# Altium PCB MW7_PA.PcbDoc
Units mm, origin at the board's own origin, x right, y up, seen from the top; angles counter-clockwise.
Board outline 102.95 x 61.65 mm, 2 copper layers (Top Layer, Bottom Layer); 33 components, 16 nets, 118 pads, 666 vias.
Unrouted connection lines stored in the file: 24.
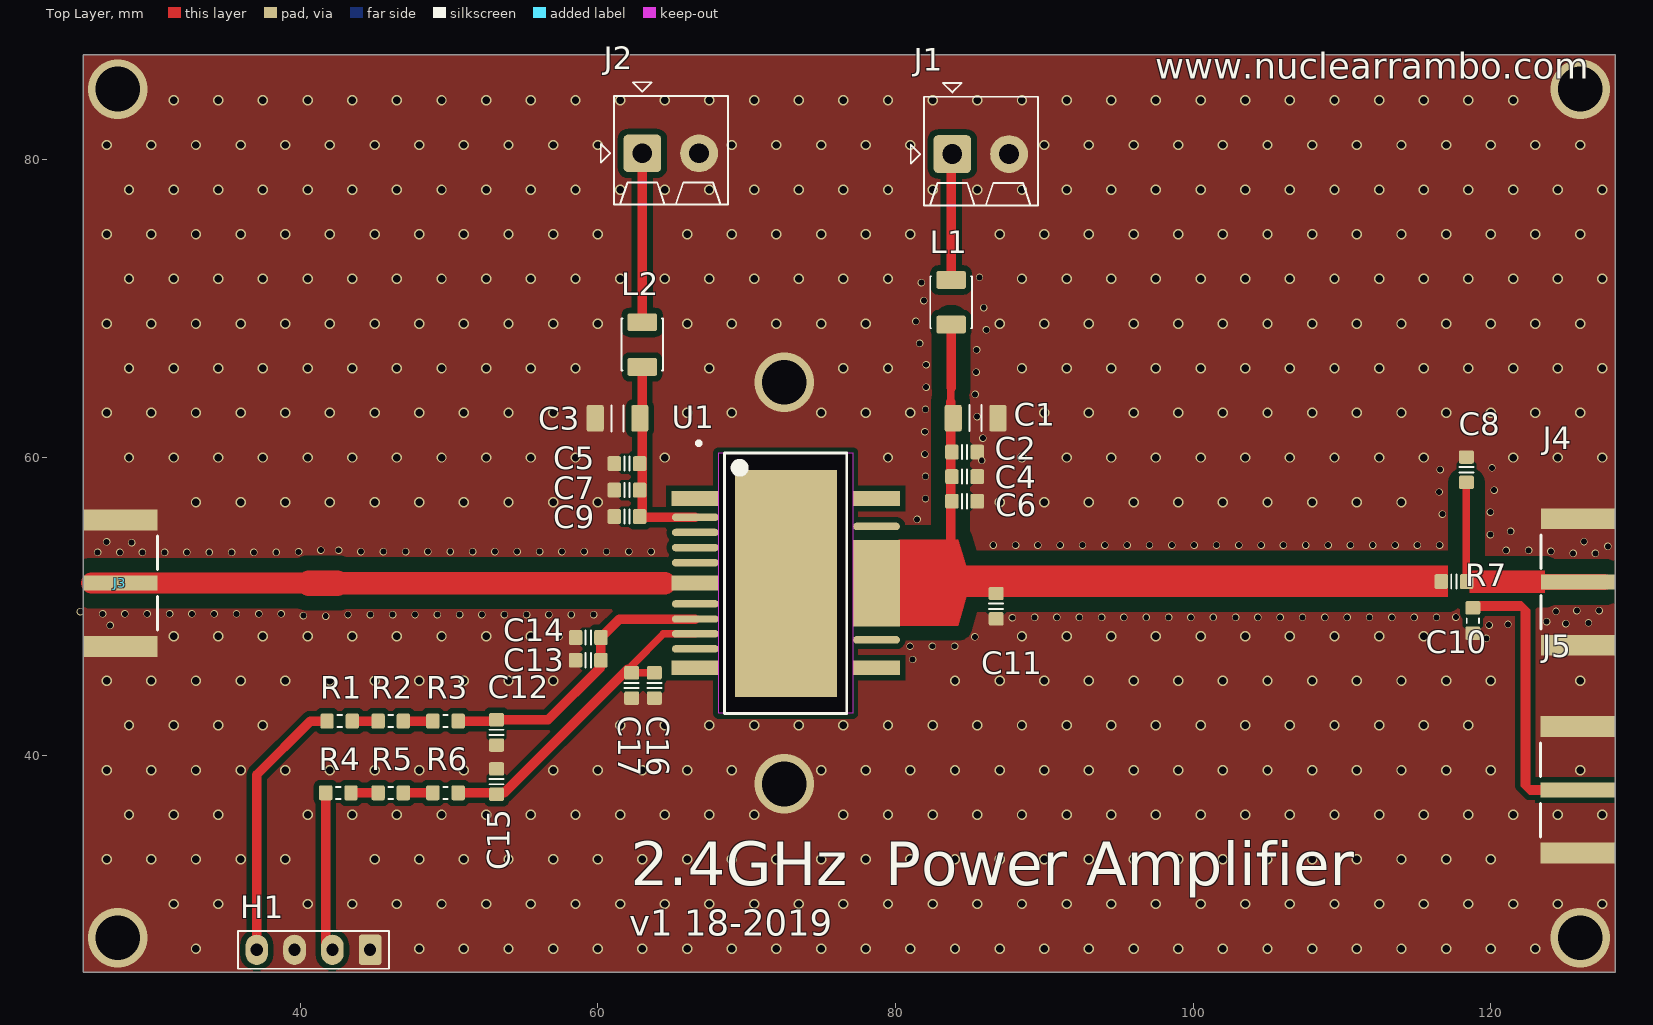
[diagram p0: Top Layer view]
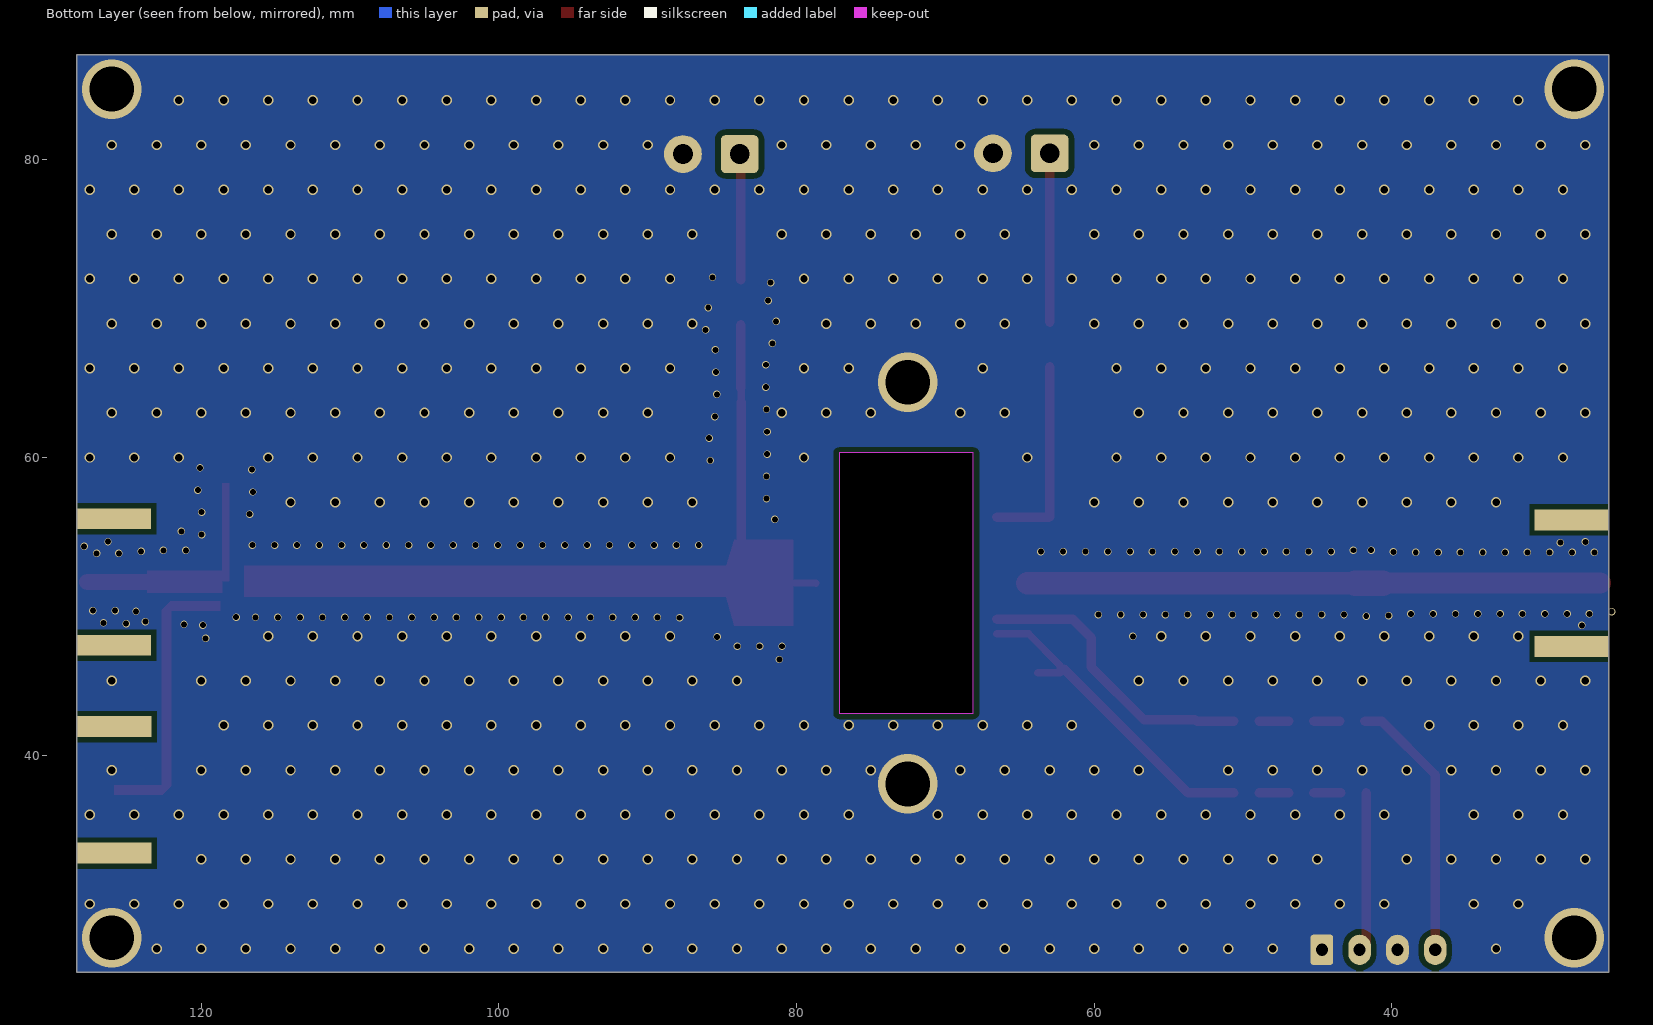
[diagram p1: Bottom Layer view, seen from below]

## Layer stack, top to bottom
Top Solder: solder mask 0.0102, Solder Resist, Dk 3.5
Top Layer: signal copper 0.0356
Dielectric 1: dielectric 0.32, FR-4, Dk 4.8
Bottom Layer: signal copper 0.0356
Bottom Solder: solder mask 0.0102, Solder Resist, Dk 3.5

## Board outline
25.425,25.425 25.425,87.071 128.372,87.071 128.372,25.425
cut-out: 77.128,60.312 77.128,42.812 68.128,42.812 68.128,60.312

## Design rules (kind name [scope] priority, off if disabled: settings)
Clearance [(InNet('RF_out') or InNet('RF_match_out') or InNet('RFin')) and not IsPad vs InNet('GND')] p1: gap=1 ignorepadtopadclearanceinfootprint=TRUE
Clearance Clearance_1 [All] p2: gap=0.381 ignorepadtopadclearanceinfootprint=TRUE
PolygonConnect [All] p1: connectstyle=Direct reliefconductorwidth=0.254 reliefentries=4 polygonreliefangle="90 Angle" airgapwidth=0.254
RoutingVias [All] p1: holewidth=0.711 width=1.27 viastyle="Through Hole" minholewidth=0.711 minwidth=1.27 maxholewidth=0.711 maxwidth=1.27
SolderMaskExpansion [All] p1: expansion=0.102
Width [All] p1: maxlimit=6 minlimit=0.254 preferedwidth=1.4
30 further rules are at their usual default settings.

## Components (designator, comment, footprint, x,y, rotation, side; value= is the part's Value field where it differs from the comment)
C1 "10u" CAPC3216X180N 85.38,62.643 r180 top value=100n
C2 "approved sub OK" CAPC1608X90N 84.642,60.365 r0 top value=1µ
C3 "100n" CAPC3216X180N 61.325,62.636 r0 top
C4 "6.8p" CAPC1608X90N 84.642,58.714 r0 top
C5 "approved sub OK" CAPC1608X90N 61.96,59.588 r180 top value=1µ
C6 "approved sub OK" CAPC1608X90N 84.642,57.063 r0 top value=10n
C7 "approved sub OK" CAPC1608X90N 61.96,57.81 r180 top value=10n
C8 "6.8p" CAPC1608X90N 118.364,59.182 r270 top
C9 "6.8p" CAPC1608X90N 61.96,56.032 r180 top
C10 "3.6p" CAPC1608X90N 117.526,51.664 r180 top
C11 "2.4p" CAPC1608X90N 86.766,50.013 r270 top
C12 "approved sub OK" CAPC1608X90N 53.197,41.529 r270 top value=1µ
C13 "approved sub OK" CAPC1608X90N 59.36,46.38 r180 top value=10n
C14 "6.8p" CAPC1608X90N 59.36,47.904 r180 top
C15 "approved sub OK" CAPC1608X90N 53.197,38.227 r90 top value=1µ
C16 "approved sub OK" CAPC1608X90N 63.8,44.685 r270 top value=10n
C17 "6.8p" CAPC1608X90N 62.276,44.685 r270 top
H1 "Programmer" HDR1X4_2.54MMP 44.704,26.924 r180 top
J1 "Stackable ScrewTerm" 2P_PCB_ScrewTerm_90S_3.81MM 83.82,80.391 r270 top value="2 position"
J2 "Stackable ScrewTerm" 2P_PCB_ScrewTerm_90S_3.81MM 62.992,80.442 r270 top value="2 position"
J3 "RFIN" ROS-32K145-400L5_V 25.4,51.562 r90 top
J4 "RFOUT" ROS-32K145-400L5_V 128.372,51.638 r270 top
J5 "RFmon" ROS-32K145-400L5_V 128.346,37.668 r270 top
L1 "NLCV32T" INDM3225X240N 83.741,70.434 r90 top value=2µ2
L2 "NLCV32T" INDM3225X240N 62.988,67.589 r90 top value=2µ2
R1 "Thick Film" RESC1608X55N 42.656,42.291 r0 top value=15K
R2 "Thick Film" RESC1608X55N 46.085,42.291 r0 top value=1K
R3 "Thick Film" RESC1608X55N 49.768,42.291 r0 top value=1K
R4 "Thick Film" RESC1608X55N 42.568,37.469 r0 top value=15K
R5 "Thick Film" RESC1608X55N 46.085,37.469 r0 top value=1K
R6 "Thick Film" RESC1608X55N 49.768,37.469 r0 top value=1K
R7 "Thick Film" RESC1608X55N 118.796,49.047 r270 top value=51R
U1 "MW7IC2725N1" CFP102P1410X258-16N 72.628,51.562 r0 top

## Footprints (in the part's own frame and the unit in brackets; to place one, negate y for a bottom-side part, rotate by r counter-clockwise, add the part's x,y. Pads: shape width x height; smd on the part's side, far side on the other; paste and mask are expansions set on the pad)
2P_PCB_ScrewTerm_90S_3.81MM [mil] "TERM BLOCK 2POS SIDE ENT STACKABLE 3.81MM"
  rrect25% 100x100 hole 52: 1(0,0)
  round 100 hole 52: 2(0,150)
  silkscreen extent -188,-110 136,226, body extent -152,-75 136,225, height 335
CAPC1608X90N [mm] "Chip Capacitor, Body 1.6x0.8mm, EIA 0603, IPC Medium Density"
  round 0.254 on Mech15: 0(0,0)
  rrect25% 0.9x1 smd: 1(-0.85,0) 2(0.85,0)
  Top Layer pour cut-out: -0.6,0.5 -0.4,0.7 0.4,0.7 0.6,0.5 0.6,-0.5 0.4,-0.7 -0.4,-0.7 -0.6,-0.5
  silkscreen extent -0.18,-0.48 0.18,0.48, body extent -0.85,-0.45 0.85,0.45, height 0.89
CAPC3216X180N [mm] "Chip Capacitor, Body 3.2x1.6mm, 1.8mm H, EIA 1206, IPC Medium Density"
  round 0.508 on Mech15: 0(0,0)
  rrect25% 1.15x1.8 smd: 1(-1.5,0) 2(1.5,0)
  silkscreen extent -0.4,-0.88 0.4,0.88, body extent -1.7,-0.9 1.7,0.9, height 1.8
CFP102P1410X258-16N [mm] "CFP, 16-Leads, Body 17.50x9.00mm (max), Pitch 1.02mm, IPC Medium Density"
  rect 3.15x1 smd: 1(-6.096,5.69) 6(-6.096,0) 11(-6.096,-5.69) 12(6.096,-5.69) 16(6.096,5.69)
  oval 3.15x0.5 smd: 2(-6.071,4.42) 3(-6.071,3.404) 4(-6.071,2.388) 5(-6.071,1.372) 7(-6.071,-1.397) 8(-6.071,-2.413) 9(-6.071,-3.404) 10(-6.071,-4.42) 13(6.096,-3.81) 15(6.096,3.81)
  rect 3.15x5.8 smd: 14(6.096,0)
  rect 6.86x15.24 smd: 17(0.025,-0.025)
  silkscreen extent -5.97,-8.75 4.1,9.52, body extent -4.5,-8.75 4.5,8.75, height 2.58
HDR1X4_2.54MMP [mil] "Connector; Header; 4 Position 0.100\" pitch"
  rrect25% 60x80 hole 32: 1(0,0)
  oval 60x80 hole 32: 2(100,0) 3(200,0) 4(300,0)
  silkscreen extent -50,-50 350,50
INDM3225X240N [mm] "Molded Inductor, 2-Leads, Body 3.2x2.5mm, IPC Medium Density"
  round 0.508 on Mech15: 0(0,0)
  rrect25% 1.2x2 smd: 1(-1.5,0) 2(1.5,0)
  silkscreen extent -1.75,-1.4 1.75,1.4, body extent -1.79,-1.35 1.79,1.35, height 2.4
RESC1608X55N [mm] "Chip Resistor, Body 1.6x0.8mm, EIA 0603, IPC Medium Density"
  round 0.254 on Mech15: 0(0,0)
  rrect25% 0.9x1 smd: 1(-0.85,0) 2(0.85,0)
  Top Layer pour cut-out: -0.6,0.5 -0.4,0.7 0.4,0.7 0.6,0.5 0.6,-0.5 0.4,-0.7 -0.4,-0.7 -0.6,-0.5
  silkscreen extent -0.15,-0.41 0.15,0.41, body extent -0.87,-0.47 0.88,0.48, height 0.54
ROS-32K145-400L5_V [mm] "SMA Right Angle Jack, Edge Mount, 14.25x9.5x4.46mm, Rosenberger Recommended"
  rect 1x5 smd: 1(0,-2.5)
  rect 1.4x5 smd: MP(-4.25,-2.5) MP(4.25,-2.5)
  rect 1.4x5 smd far side paste-2: ""(-4.25,-2.5) ""(4.25,-2.5)
  silkscreen extent -3.15,-5 3.15,-5, body extent -4.75,-4.75 4.75,9.5, height 4.46

## Part data
C1 C3: library part CAPC_100n_1206_NP0_50V_5%, "Capacitor SMD Cer 100nF 1206 NP0 50V 5%", Manufacturer 1="TDK Corporation", Manufacturer Part Number 1=C3216C0G1H104J160AA, Operating Temperature="-55°C ~ 125°C", Package / Case="1206 (3216 Metric)", Ratings="50V; NP0", Supplier Part Number 1=445-7694-1-ND, Tolerance=±5%, ComponentLink1Description=http://product.tdk.com/capacitor/mlcc/en/documents/mlcc_commercial_general_en.pdf, ComponentLink1URL=http://product.tdk.com/capacitor/mlcc/en/documents/mlcc_commercial_general_en.pdf, SCDType=undef, Size / Dimension="0.126\" L x 0.063\" W (3.20mm x 1.60mm)", Supplier 1=Digi-Key, Thickness (Max)="0.075\" (1.90mm)"
C2 C5 C12 C15: library part CAPC_1u_0603_X7R_16V_10%, "Capacitor SMD Cer 1uF 10% 16V X7R 0603", Manufacturer 1="TDK Corporation", Manufacturer Part Number 1=C1608X7R1C105K, Package / Case="0603 (1608 metric)", Ratings="16V; X7R", Supplier Part Number 1=445-1604-1-ND, Tolerance=±10%, ComponentLink1Description=http://product.tdk.com/capacitor/mlcc/en/documents/mlcc_commercial_general_en.pdf, ComponentLink1URL=http://product.tdk.com/capacitor/mlcc/en/documents/mlcc_commercial_general_en.pdf, Material=ceramic, SCDType=spec, Supplier 1=Digi-Key
C4 C8 C9 C10 C11 C14 C17: library part CAPC_8p_0603_NP0_50V, "Capacitor SMD Cer 8pF ±0.5pF 50V NP0 0603", Manufacturer 1="Murata Electronics North America", Manufacturer Part Number 1=GRM1885C1H8R0DZ01D, Operating Temperature="-55°C ~ 125°C", Package / Case="0603 (1608 Metric)", Ratings="50V; NP0", Supplier Part Number 1=490-1399-1-ND, Tolerance=±0.5pF, ComponentLink1Description="GRM1885C1H8R0DZ01 datasheet.pdf", ComponentLink1URL=http://search.murata.co.jp/Ceramy/image/img/PDF/ENG/GRM1885C1H8R0DZ01.pdf, SCDType=undef, Size / Dimension="0.063\" L x 0.032\" W (1.60mm x 0.81mm)", Supplier 1=Digi-Key, Thickness (Max)="0.035\" (0.90mm)"
C6 C7 C13 C16: library part CAPC_10n_0603_X7R_100V_10%, "Capacitor SMD Cer 10nF 10% 100V X7R 0603", Manufacturer="Murata Electronics North America", Manufacturer Part Number=GCM188R72A103KA37D, Package / Case="0603 (1608 metric)", Ratings="100V; X7R", Supplier Part Number 1=490-4781-1-ND, Tolerance=±10%, Material=ceramic, SCDType=undef, Supplier 1=Digi-Key
H1: library part Header4P, "Header 4-pin"
J1 J2: library part 2P_ScrewTerm_90S_3.81MM, "Terminal Block Screw Type THT 2-Position 3.81mm pitch", Color=Black, Manufacturer 1="Tyco Electronics", Manufacturer Part Number 1=1776113-2, Package / Case="Side Entry; 3.81mm pitch", Supplier Part Number 1=A97976-ND, Category="Connectors Interconnects", Pitch="0.150\" (3.81mm)", Positions Per Level=2, SCDType=undef, Supplier 1=Digi-Key
J3 J4 J5: library part 32K145-400L5, "SMA Right Angle Jack, Edge Mount, Up to 18 GHz, -55 to 155 degC", ComponentLink1Description="Manufacturer URL", ComponentLink1URL=http://www.rosenberger.de, ComponentLink2Description=Datasheet, ComponentLink2URL=http://rosenberger.de/ok/images/documents/db/32K145-400L5.pdf, ComponentLink3Description="Package Specification", ComponentLink3URL=http://rosenberger.de/ok/images/documents/db/32K145-400L5.pdf, ComponentLink4Description="Series Overview / Design Note", ComponentLink4URL=http://rosenberger.de/ok/images/documents/spez/32.pdf, ComponentLink5Description="Webshop / RFQ", ComponentLink5URL=http://www.rosenberger.com/en/contact/sales/, DatasheetVersion=b00, Desgin Note 2="For more information about DRC setting, please look at following webpage, http://techdocs.altium.com/display/SCRT/Design+Rule+for+Edge-Mount+Connectors", Design Note 1="Footprint in library is a generic example - only application specific footprint delivers High Performance", Mounting Technology="Surface Mount", PackageDescription="SMA Right Angle Jack, Edge Mount, 14.25 x 9.5 x 4.46 mm", PackageReference=32K145-400L5, PackageVersion=b00, PartNumber=32K145-400L5
L1 L2: library part INDC_2u2_1210_1200mA, "Inductor 2.2uH 1.2A 1210 SMD chip", DC Resistance (DCR)="115 mOhm", Frequency - Self Resonant=68MHz, Frequency - Test=7.96MHz, Manufacturer 1="TDK Corporation", Manufacturer Part Number 1=NLCV32T-2R2M-PFR, Operating Temperature="-40°C ~ 125°C", Package / Case="1210 (3225 Metric)", Q @ Freq="15 @ 7.96MHz", Ratings="1.2 Adc", Supplier Part Number 1=445-3650-1-ND, Tolerance=±20%, ComponentLink1Description=http://www.tdk.co.jp/tefe02/e511_nlcv_nlc.pdf, ComponentLink1URL=http://www.tdk.co.jp/tefe02/e511_nlcv_nlc.pdf, SCDType=source, Supplier 1=Digi-Key, Type="Ferrite Core"
R1 R4: library part RES_15K_0603_1%, "Resistor SMD chip 15k Ohm 0.1W 1% 0603", Manufacturer 1="Rohm Semiconductor", Manufacturer 2=Yageo, Manufacturer 3="Panasonic Electronic Components", Manufacturer 4="Stackpole Electronics Inc", Manufacturer 5="Vishay Dale", Manufacturer Part Number 1=MCR03ERTF1502, Manufacturer Part Number 2=RC0603FR-0715KL, Manufacturer Part Number 3=ERJ-3EKF1502V, Manufacturer Part Number 4=RMCF0603FT15K0, Manufacturer Part Number 5=CRCW060315K0FKEAHP, Package / Case="0603 (1608 metric)", Ratings="1/10 W", Supplier Part Number 1=RHM15.0KCFCT-ND, Tolerance=±1%, ComponentLink1Description=http://rohmfs.rohm.com/en/products/databook/datasheet/passive/resistor/chip_resistor/mcr_g.pdf, ComponentLink1URL=http://rohmfs.rohm.com/en/products/databook/datasheet/passive/resistor/chip_resistor/mcr_g.pdf, ComponentLink2Description=http://www.yageo.com/documents/recent/PYu-RC0603_51_RoHS_L_4.pdf, ComponentLink2URL=http://www.yageo.com/documents/recent/PYu-RC0603_51_RoHS_L_4.pdf, ComponentLink3Description=http://industrial.panasonic.com/www-cgi/jvcr13pz.cgi?E+PZ+3+AOA0002+ERJ3EKF1502V+7+WW, ComponentLink3URL=http://industrial.panasonic.com/www-cgi/jvcr13pz.cgi?E+PZ+3+AOA0002+ERJ3EKF1502V+7+WW, ComponentLink4Description=http://www.seielect.com/Catalog/SEI-RMCF_RMCP.pdf, ComponentLink4URL=http://www.seielect.com/Catalog/SEI-RMCF_RMCP.pdf, ComponentLink5Description=http://www.vishay.com/docs/20043/crcwhpe3.pdf, ComponentLink5URL=http://www.vishay.com/docs/20043/crcwhpe3.pdf, Material="Thick Film", RoHS 1="RoHS Compliant", RoHS 2="RoHS Compliant", RoHS 3="RoHS Compliant", RoHS 4="RoHS Compliant", RoHS 5="RoHS Compliant", SCDType=spec, Supplier 1=Digi-Key, Supplier 2=Digi-Key, Supplier 3=Digi-Key, Supplier 4=Digi-Key, Supplier 5=Digi-Key, Supplier Part Number 2=311-15.0KHRCT-ND, Supplier Part Number 3=P15.0KHCT-ND, Supplier Part Number 4=RMCF0603FT15K0CT-ND, Supplier Part Number 5=541-15.0KSCT-ND
R2 R3 R5 R6: library part RES_1K_0603_1%, "Resistor SMD chip 1k Ohm 0.1W 1% 0603", Manufacturer 1=Yageo, Manufacturer Part Number 1=RC0603FR-071KL, Package / Case="0603 (1608 Metric)", Ratings=1/10W, Supplier Part Number 1=311-1.00KHRCT-ND, Tolerance=±1%, SCDType=spec, Supplier 1=Digi-Key
R7: library part RES_51R_0603_1%, "Resistor SMD chip 51 Ohm 0.1W 1% 0603", Manufacturer 1=Yageo, Manufacturer Part Number 1=RC0603FR-0751RL, Package / Case="0603 (1608 metric)", Ratings="1/10 W", Supplier Part Number 1=311-51.0HRCT-ND, Tolerance=±1%, Material="Thick Film", SCDType=spec, Supplier 1=Digi-Key
U1: "The MW7IC2725N wideband integrated circuit is designed with on- chip / matching that makes it usable from 2300- 2700 MHz. This multi- stage / structure is rated for 26 to 32 Volt operation and covers all typical cellular / base station modulation formats.", ComponentLink1Description=Datasheet, ComponentLink1URL=https://www.nxp.com/docs/en/data-sheet/MW7IC2725N.pdf

## Via types
v1: diameter 0.7, hole 0.5, Top Layer to Bottom Layer, 514 vias
v2: diameter 0.5, hole 0.4, Top Layer to Bottom Layer, 146 vias
v3: diameter 4, hole 3, Top Layer to Bottom Layer, 6 vias

## Nets (pads, with @x,y where several pads share a name; then routed paths per layer and width w, separated by ;. In a path a pad name is that pad's centre, name@x,y a point inside that pad or via, vN(x,y) a via of type N, cw(c..) or ccw(c..) an arc to the next point about the centre after c; other vN are vias at no path point)
GND: C1.1 C2.2 C3.1 C4.2 C5.2 C6.2 C7.2 C8.1 C9.2 C11.2 C12.2 C13.2 C14.2 C15.2 C16.2 C17.2 H1.1 H1.3 J1.2 J2.2 J3.MP J4.MP J5.MP R7.2 U1.17
  other v1: 33,27 48,27 51,27 54,27 57,27 60,27 63,27 66,27 69,27 72,27 75,27 78,27 81,27 84,27 87,27 90,27 93,27 96,27 99,27 102,27 105,27 108,27 111,27 114,27 117,27 120,27 123,27 31.5,30 34.5,30 40.5,30 43.5,30 46.5,30 49.5,30 52.5,30 55.5,30 58.5,30 61.5,30 64.5,30 67.5,30 70.5,30 73.5,30 76.5,30 79.5,30 82.5,30 85.5,30 88.5,30 91.5,30 94.5,30 97.5,30 100.5,30 103.5,30 106.5,30 109.5,30 112.5,30 115.5,30 118.5,30 121.5,30 124.5,30 127.5,30 27,33 30,33 33,33 36,33 39,33 45,33 48,33 51,33 54,33 57,33 60,33 63,33 66,33 69,33 72,33 75,33 78,33 81,33 84,33 87,33 90,33 93,33 96,33 99,33 102,33 105,33 108,33 111,33 114,33 117,33 120,33 28.5,36 31.5,36 34.5,36 40.5,36 43.5,36 46.5,36 49.5,36 52.5,36 55.5,36 58.5,36 61.5,36 64.5,36 67.5,36 70.5,36 76.5,36 79.5,36 82.5,36 85.5,36 88.5,36 91.5,36 94.5,36 97.5,36 100.5,36 103.5,36 106.5,36 109.5,36 112.5,36 115.5,36 118.5,36 121.5,36 124.5,36 127.5,36 27,39 30,39 33,39 36,39 39,39 42,39 45,39 48,39 51,39 57,39 60,39 63,39 66,39 69,39 75,39 78,39 81,39 84,39 87,39 90,39 93,39 96,39 99,39 102,39 105,39 108,39 111,39 114,39 117,39 120,39 126,39 28.5,42 31.5,42 34.5,42 37.5,42 61.5,42 64.5,42 67.5,42 70.5,42 73.5,42 76.5,42 79.5,42 82.5,42 85.5,42 88.5,42 91.5,42 94.5,42 97.5,42 100.5,42 103.5,42 106.5,42 109.5,42 112.5,42 115.5,42 118.5,42 27,45 30,45 33,45 36,45 39,45 42,45 45,45 48,45 51,45 54,45 57,45 84,45 87,45 90,45 93,45 96,45 99,45 102,45 105,45 108,45 111,45 114,45 117,45 120,45 126,45 31.5,48 34.5,48 37.5,48 40.5,48 43.5,48 46.5,48 49.5,48 52.5,48 55.5,48 88.5,48 91.5,48 94.5,48 97.5,48 100.5,48 103.5,48 106.5,48 109.5,48 112.5,48 115.5,48 33,57 36,57 39,57 42,57 45,57 48,57 51,57 54,57 57,57 60,57 87,57 90,57 93,57 96,57 99,57 102,57 105,57 108,57 111,57 114,57 28.5,60 31.5,60 34.5,60 37.5,60 40.5,60 43.5,60 46.5,60 49.5,60 52.5,60 55.5,60 58.5,60 64.5,60 79.5,60 88.5,60 91.5,60 94.5,60 97.5,60 100.5,60 103.5,60 106.5,60 109.5,60 112.5,60 115.5,60 121.5,60 124.5,60 127.5,60 27,63 30,63 33,63 36,63 39,63 42,63 45,63 48,63 51,63 54,63 57,63 66,63 69,63 75,63 78,63 81,63 90,63 93,63 96,63 99,63 102,63 105,63 108,63 111,63 114,63 117,63 120,63 123,63 126,63 28.5,66 31.5,66 34.5,66 37.5,66 40.5,66 43.5,66 46.5,66 49.5,66 52.5,66 55.5,66 58.5,66 67.5,66 76.5,66 79.5,66 88.5,66 91.5,66 94.5,66 97.5,66 100.5,66 103.5,66 106.5,66 109.5,66 112.5,66 115.5,66 118.5,66 121.5,66 124.5,66 127.5,66 27,69 30,69 33,69 36,69 39,69 42,69 45,69 48,69 51,69 54,69 57,69 60,69 66,69 69,69 72,69 75,69 78,69 87,69 90,69 93,69 96,69 99,69 102,69 105,69 108,69 111,69 114,69 117,69 120,69 123,69 126,69 28.5,72 31.5,72 34.5,72 37.5,72 40.5,72 43.5,72 46.5,72 49.5,72 52.5,72 55.5,72 58.5,72 61.5,72 64.5,72 67.5,72 70.5,72 73.5,72 76.5,72 79.5,72 88.5,72 91.5,72 94.5,72 97.5,72 100.5,72 103.5,72 106.5,72 109.5,72 112.5,72 115.5,72 118.5,72 121.5,72 124.5,72 127.5,72 27,75 30,75 33,75 36,75 39,75 42,75 45,75 48,75 51,75 54,75 57,75 60,75 66,75 69,75 72,75 75,75 78,75 81,75 87,75 90,75 93,75 96,75 99,75 102,75 105,75 108,75 111,75 114,75 117,75 120,75 123,75 126,75 28.5,78 31.5,78 34.5,78 37.5,78 40.5,78 43.5,78 46.5,78 49.5,78 52.5,78 55.5,78 58.5,78 61.5,78 64.5,78 67.5,78 70.5,78 73.5,78 76.5,78 79.5,78 82.5,78 85.5,78 88.5,78 91.5,78 94.5,78 97.5,78 100.5,78 103.5,78 106.5,78 109.5,78 112.5,78 115.5,78 118.5,78 121.5,78 124.5,78 127.5,78 27,81 30,81 33,81 36,81 39,81 42,81 45,81 48,81 51,81 54,81 57,81 60,81 69,81 72,81 75,81 78,81 81,81 90,81 93,81 96,81 99,81 102,81 105,81 108,81 111,81 114,81 117,81 120,81 123,81 126,81 31.5,84 34.5,84 37.5,84 40.5,84 43.5,84 46.5,84 49.5,84 52.5,84 55.5,84 58.5,84 61.5,84 64.5,84 67.5,84 70.5,84 73.5,84 76.5,84 79.5,84 82.5,84 85.5,84 88.5,84 91.5,84 94.5,84 97.5,84 100.5,84 103.5,84 106.5,84 109.5,84 112.5,84 115.5,84 118.5,84 121.5,84
  other v2: 81.153,46.431 80.977,47.321 82.477,47.321 83.977,47.321 119.71,47.854 85.34,47.948 57.404,47.981 27.229,48.717 119.888,48.743 121.158,48.793 125.044,48.844 126.568,48.895 123.749,48.971 87.852,49.234 89.352,49.261 90.852,49.261 92.352,49.261 93.852,49.261 95.352,49.261 96.852,49.261 98.352,49.261 99.852,49.261 101.352,49.261 102.852,49.261 104.352,49.261 105.852,49.261 107.352,49.261 108.852,49.261 110.352,49.261 111.852,49.261 113.352,49.261 114.852,49.261 116.352,49.261 117.653,49.276 41.72,49.343 40.221,49.381 43.217,49.444 44.717,49.444 46.217,49.444 47.717,49.444 49.217,49.444 50.717,49.444 52.217,49.444 53.717,49.444 55.217,49.444 56.717,49.444 58.217,49.444 59.717,49.444 26.725,49.494 28.225,49.494 29.725,49.494 31.225,49.494 32.725,49.494 34.225,49.494 35.725,49.494 37.225,49.494 38.725,49.494 25.232,49.642 124.384,49.657 125.784,49.716 127.284,49.716 125.53,53.561 127.03,53.561 26.393,53.63 27.893,53.63 29.393,53.63 30.893,53.63 32.393,53.63 33.893,53.63 35.393,53.63 36.893,53.63 38.393,53.63 39.893,53.658 44.086,53.68 45.586,53.68 47.086,53.68 48.586,53.68 50.086,53.68 51.586,53.68 53.086,53.68 54.586,53.68 56.086,53.68 57.586,53.68 59.086,53.68 60.586,53.68 62.086,53.68 63.586,53.68 124.037,53.701 41.388,53.781 42.588,53.769 121.038,53.763 122.538,53.763 127.864,54.026 86.57,54.112 88.07,54.112 89.57,54.112 91.07,54.112 92.57,54.112 94.07,54.112 95.57,54.112 97.07,54.112 98.57,54.112 100.07,54.112 101.57,54.112 103.07,54.112 104.57,54.112 106.07,54.112 107.57,54.112 109.07,54.112 110.57,54.112 112.07,54.112 113.57,54.112 115.07,54.112 116.57,54.112 28.677,54.28 27,54.331 126.263,54.356 119.98,54.826 121.336,55.042 81.452,55.845 116.748,56.2 119.98,56.326 82.017,57.234 116.534,57.685 120.221,57.807 82.017,58.734 116.595,59.184 120.082,59.3 85.799,59.801 81.983,60.234 85.879,61.299 81.983,61.734 85.491,62.748 82.017,63.234 85.356,64.242 82.056,64.733 85.427,65.74 82.056,66.233 85.45,67.24 81.622,67.669 86.115,68.584 81.367,69.147 85.934,70.073 81.913,70.544 81.737,71.755 85.649,72.111
  other v3: 27.737,27.737 126.009,27.737 72.517,38.069 72.517,65.049 27.737,84.76 126.009,84.76
NetH1_2: H1.2 R4.1 | length 10.7
  Top Layer w0.635: R4.1 41.718,27.37 H1.2
NetH1_4: H1.4 R1.1 | length 18
  Top Layer w0.635: H1.4 37.084,38.684 40.691,42.291 R1.1
NetJ1_1: J1.1 L1.2 | length 8.5
  Top Layer w0.635: L1.2 83.741,80.312 J1.1
NetJ2_1: J2.1 L2.2 | length 11.4
  Top Layer w0.635: L2.2 62.988,80.438 J2.1
NetJ5_1: J5.1 R7.1
NetR1_2: R1.2 R2.1 | length 1.7
  Top Layer w0.635: R1.2 R2.1
NetR2_2: R2.2 R3.1 | length 2
  Top Layer w0.635: R2.2 R3.1
NetR4_2: R4.2 R5.1 | length 1.8
  Top Layer w0.635: R4.2 R5.1
NetR5_2: R5.2 R6.1 | length 2
  Top Layer w0.635: R5.2 R6.1
RF_match_out: C8.2 C10.1 J4.1 | length 5.3
  Top Layer w1.1: 122.326,51.638 J4.1 J4.1@127.66,51.638
RF_out: C1.2 C2.1 C4.1 C6.1 C10.2 C11.1 L1.1 U1.14 | length 21
  Top Layer w0.508: U1.14 84.785,51.689 ; 83.702,63.76 83.702,64.652 83.741,64.691
  Top Layer w0.635: 83.702,54.061 83.702,63.76 ; 83.741,64.691 L1.1
RFin: J3.1 U1.6 | length 39.1
  Top Layer w0.305: J3.1@25.425,51.562 J3.1@25.984,51.562
  Top Layer w1.4: J3.1@25.984,51.562 J3.1 40.6,51.562
  Top Layer w1.5: 42.5,51.562 64.5,51.562
  Top Layer w1.7: 40.6,51.562 42.5,51.562
VDS1: C3.2 C5.1 C7.1 C9.1 L2.1 U1.2 | length 13.6
  Top Layer w0.635: L2.1 62.988,59.588 62.988,57.81 62.988,56.032 63.039,55.982 U1.2
VGS1: C12.1 C13.1 C14.1 R3.2 U1.8 | length 19.9
  Top Layer w0.635: R3.2 53.109,42.291 C12.1 56.654,42.379 60.21,45.935 C13.1 C14.1 61.454,49.149 U1.8
VGS2: C15.1 C16.1 C17.1 R6.2 U1.9 | length 22
  Top Layer w0.508: C16.1 C17.1 62.276,46.02 64.414,48.158 U1.9
  Top Layer w0.635: R6.2 53.7,37.469 C17.1@62.021,45.79
pads on no net: C1.0 C2.0 C3.0 C4.0 C5.0 C6.0 C7.0 C8.0 C9.0 C10.0 C11.0 C12.0 C13.0 C14.0 C15.0 C16.0 C17.0 J3. J4. J5. L1.0 L2.0 R1.0 R2.0 R3.0 R4.0 R5.0 R6.0 R7.0 U1.1 U1.3 U1.4 U1.5 U1.7 U1.10 U1.11 U1.12 U1.13 U1.15 U1.16

## Polygon pours and split planes (outlines as drawn)
GND on Top Layer (solid, remove dead copper, pour order 4): 25.425,87.071 25.425,25.425 128.372,25.425 128.372,87.071
RF_out on Top Layer (solid, pour order 2): 84.201,48.683 84.201,54.483 84.963,51.943 84.963,51.435
no net on Top Layer (solid, pour order 0): 84.201,54.483
GND on Bottom Layer (solid, pour order 6): 25.425,87.071 25.425,25.425 128.372,25.425 128.372,87.071
no net on Bottom Solder (solid): 25.425,87.071 128.372,87.071 128.372,25.425 25.425,25.425

## Other copper
Top Layer:
  rectangle net RF_match_out: 118.567,50.902 123.647,52.402
  rectangle net RF_match_out: 118.11,51.664 118.618,58.306
  rectangle net RF_out: 86.639,50.622 117.119,52.75
  rectangle net RF_out: 84.607,50.622 86.766,52.75
  rectangle net RF_out: 80.201,48.683 84.201,54.483
  region net NetJ5_1: 122.644,49.774 122.644,37.986 125.846,37.986 125.846,37.351 122.644,37.351 122.58,37.351 122.009,37.922 122.009,49.711 118.72,49.711 118.72,50.346 122.072,50.346
  region net RF_out: 84.201,54.483 84.963,51.943 84.963,51.435 84.201,48.683

## Silkscreen, mask and mechanical layers (free items; w line width, h text height)
Top Overlay:
  text "www.nuclearrambo.com" at 97.46,84.887 h3
  text "2.4GHz  Power Amplifier" at 62.205,30.302 h5
  text "v1 18-2019" at 62.103,27.305 h3
Top Solder:
  rectangle: 25.425,48.133 128.397,55.093
  text "v1 18-2019" at 97.714,81.686 h3
Bottom Solder:
  pour cut-out: 34.265,31.471 34.265,25.527 47.955,25.527 47.955,31.471
  pour cut-out: 60.096,87.147 93.167,87.147 93.167,75.209 60.096,75.209
Mechanical 1:
  lines w0.254: 25.425,25.425 25.425,87.071 128.372,87.071 128.372,57.506 128.372,37.059 128.372,25.425 25.425,25.425
Mechanical 13:
  pour cut-out: 68.128,42.812 68.128,60.312 77.128,60.312 77.128,42.812
  pour cut-out: 68.128,42.85

## Text inside footprints (layer, text, board x,y; h text height)
J3: Mechanical 3 "Board Edge" at 25.4,43.462 h0.2 r90
J4: Mechanical 3 "Board Edge" at 128.372,59.738 h0.2 r270
J5: Mechanical 3 "Board Edge" at 128.346,45.768 h0.2 r270